# Altium PCB game-and-watch-STLINK-PCB.PcbDoc
Units mil, origin at the board's own origin, x right, y up, seen from the top; angles counter-clockwise.
Board outline 555 x 1515.81 mil, 2 copper layers (Top Layer, Bottom Layer), stack 61.756 mil thick; 31 components, 53 nets, 140 pads, 35 vias.
Unrouted connection lines stored in the file: 27.
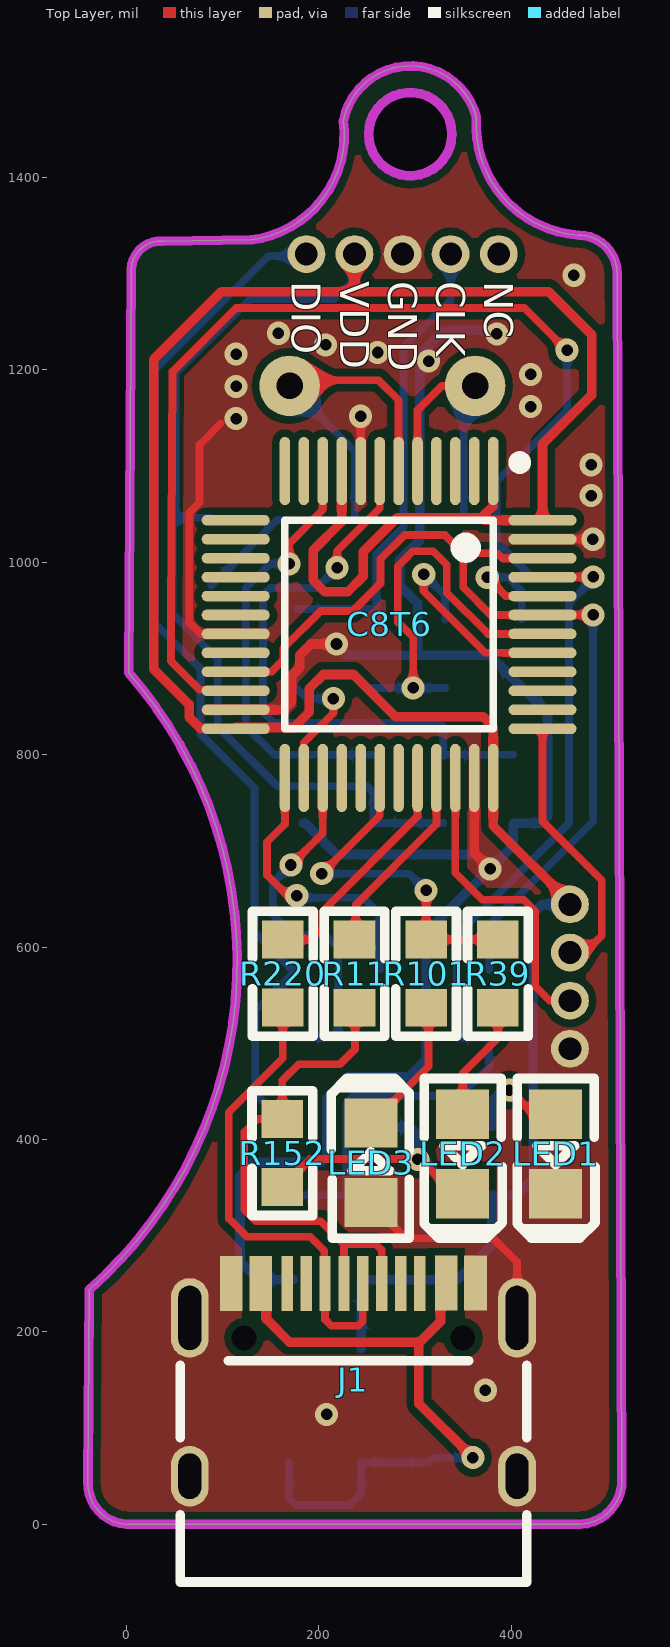
[diagram p0: Top Layer view]
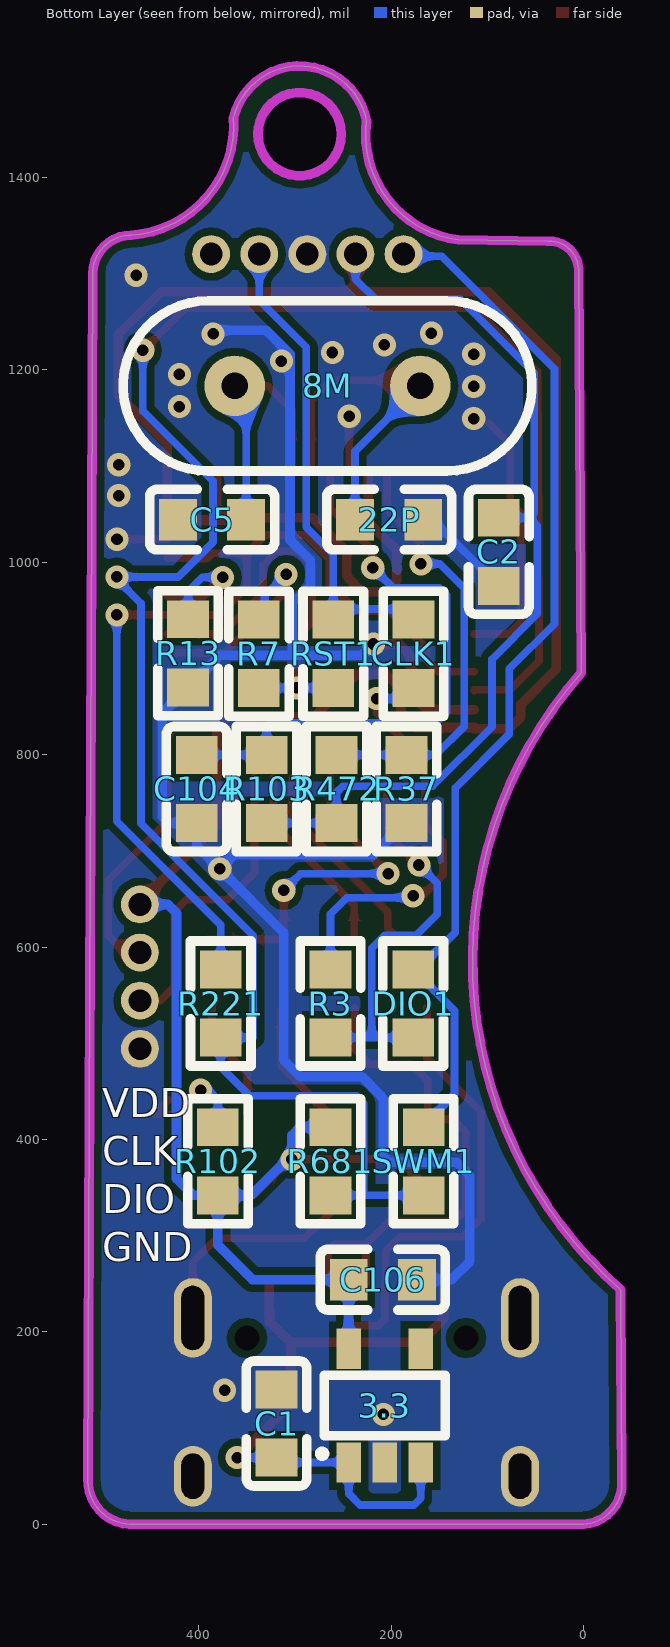
[diagram p1: Bottom Layer view, seen from below]

## Layer stack, top to bottom
Top Solder: solder mask 1, SM-001, Dk 4
Top Layer: signal copper 1.378
Dielectric 1: core 59, Core-043, Dk 4.3
Bottom Layer: signal copper 1.378
Bottom Solder: solder mask 1, SM-001, Dk 4

## Board outline
-40,45 -38.52,243.98 ccw(c-340,585) 2.36,884.96 5,1305 cw(c35.65,1303.17) 37.48,1333.82 130,1335 ccw(c115.81,1444.7) 225.51,1458.89 cw(c295,1445) 363.75,1462.19 ccw(c477.97,1454.22) 470,1340 cw(c470,1300) 510,1300 515,47.4 cw(c469.71,45.29) 471.81,0 0,0 cw(c2.5,42.5)
cut-out: 251.69,1445 ccw(c295,1445) 295,1401.69 ccw(c295,1445) 338.31,1445 ccw(c295,1445) 295,1488.31 ccw(c295,1445)

## Design rules (kind name [scope] priority, off if disabled: settings)
Clearance [All] p1: gap=8 ignorepadtopadclearanceinfootprint=TRUE except(0: Arc-Hole Track-Hole SMDPad-Hole THPad-Hole Via-Hole Fill-Hole Poly-Hole Region-Hole Text-Hole)
ComponentClearance [All] p1: gap=0 collisioncheckmode=3 verticalgap=0 showdistances=FALSE
MinimumSolderMaskSliver [All] p1: minsoldermaskwidth=0
PolygonConnect [All] p1: connectstyle=Direct reliefconductorwidth=10 reliefentries=4 polygonreliefangle="90 Angle" airgapwidth=10
RoutingVias [All] p1: holewidth=12 width=24 viastyle="Through Hole" minholewidth=12 minwidth=24 maxholewidth=12 maxwidth=24
SilkToSilkClearance [All] p1: silktosilkclearance=0
SilkToSolderMaskClearance [IsPad] p1: minsilkscreentomaskgap=0 clearancetoexposedcopper=TRUE
SolderMaskExpansion [All] p1: expansion=4 istentingtop=FALSE
Width [All] p1: maxlimit=10 minlimit=8 preferedwidth=8
26 further rules are at their usual default settings.

## Components (designator, comment, footprint, x,y, rotation, side; value= is the part's Value field where it differs from the comment)
3.3 "TPS76333DBVR" SOT-23-5 206.59,123.36 r270 bottom
8M "8MHZ" OSC-49S-1 265.99,1183.3 r90 bottom locked
22P "22p" C0603#1 201.99,1044.3 r180 bottom
C1 "10u" C0603#1 318.99,104.74 r90 bottom
C2 "10u" C0603#2 87.99,1010.84 r90 bottom
C5 "22p" C0603#1 385.99,1044.3 r0 bottom
C8T6 "STM32F103CBT6" LQFP-48_7X7X05P 272.99,935.3 r270 top
C104 "0.1u" C0603#2 401.99,764.3 r270 bottom
C106 "10u" C0603#1 208.56,254.3 r180 bottom
CLK1 "22" R0603#1 176.66,904.87 r270 bottom
DIO1 "22" R0603#1 176.99,541.3 r270 bottom
J1 "USB type C" "USB Type-C-16Pin_A" 235.91,50 r0 top locked
LED1 "17-21/BHC-XL2M2TY/3T" LED-0805 445.99,384.95 r90 top
LED2 "LED-Green(0805)" LED-SMD_0805-L 349.44,384.95 r270 top
LED3 "LED-Red(0805)" LED-SMD_0805-L 253.99,375.85 r90 top
R3 "100" R0603#2 262.99,541.3 r270 bottom
R7 "220" R0603#2 337.33,904.87 r270 bottom
R11 "22" R0603#2 237.04,572.3 r90 top
R13 "10K" R0603#2 410.99,905.3 r90 bottom
R37 "4.7k" R0603#1 183.99,764.3 r270 bottom
R39 "100" R0603#1 385.99,572.3 r270 top
R101 "100" R0603#1 311.51,572.3 r270 top
R102 "1K" R0603#2 379.99,377.3 r90 bottom
R103 "10K" R0603#2 329.33,764.3 r90 bottom
R152 "1.5k" R0603#2 161.99,385.87 r90 top
R220 "22" R0603#2 162.56,572.44 r90 top
R221 "220" R0603#2 376.99,541.3 r270 bottom
R472 "4.7k" R0603#1 256.66,764.3 r270 bottom
R681 "680" R0603#2 262.99,377.3 r90 bottom
RST1 "22" R0603#2 259.99,904.87 r90 bottom
SWM1 "22" R0603#2 166.15,377.3 r90 bottom

## Footprints (in the part's own frame and the unit in brackets; to place one, negate y for a bottom-side part, rotate by r counter-clockwise, add the part's x,y. Pads: shape width x height; smd on the part's side, far side on the other; paste and mask are expansions set on the pad)
C0603#1 [mm]
  rect 1x1.1 smd: 1(0.9,0) 2(-0.9,0)
  silkscreen extent -1.65,-0.8 1.65,0.8
C0603#2 [mm]
  rect 1x1.1 smd: 1(-0.9,0) 2(0.9,0)
  silkscreen extent -1.65,-0.8 1.65,0.8
LED-0805 [mil]
  rect 51.2x55.1 smd: 1(41.35,0) 2(-41.35,0)
  silkscreen extent -88,-41 78,40
LED-SMD_0805-L [mil]
  rect 51.2x55.1 smd: 1(41.35,0) 2(-41.35,0)
  silkscreen extent -78,-40 88,41
LQFP-48_7X7X05P [mm]
  oval 1.8x0.28 smd: 1(-4.05,2.75) 2(-4.05,2.25) 3(-4.05,1.75) 4(-4.05,1.25) 5(-4.05,0.75) 6(-4.05,0.25) 7(-4.05,-0.25) 8(-4.05,-0.75) 9(-4.05,-1.25) 10(-4.05,-1.75) 11(-4.05,-2.25) 12(-4.05,-2.75) 25(4.05,-2.75) 26(4.05,-2.25) 27(4.05,-1.75) 28(4.05,-1.25) 29(4.05,-0.75) 30(4.05,-0.25) 31(4.05,0.25) 32(4.05,0.75) 33(4.05,1.25) 34(4.05,1.75) 35(4.05,2.25) 36(4.05,2.75)
  oval 0.28x1.8 smd: 13(-2.75,-4.05) 14(-2.25,-4.05) 15(-1.75,-4.05) 16(-1.25,-4.05) 17(-0.75,-4.05) 18(-0.25,-4.05) 19(0.25,-4.05) 20(0.75,-4.05) 21(1.25,-4.05) 22(1.75,-4.05) 23(2.25,-4.05) 24(2.75,-4.05) 37(2.75,4.05) 38(2.25,4.05) 39(1.75,4.05) 40(1.25,4.05) 41(0.75,4.05) 42(0.25,4.05) 43(-0.25,4.05) 44(-0.75,4.05) 45(-1.25,4.05) 46(-1.75,4.05) 47(-2.25,4.05) 48(-2.75,4.05)
  silkscreen extent -4.42,-2.75 2.75,3.6
OSC-49S-1 [mm]
  round 1.6 hole 0.7: 1(0,-2.45) 2(0,2.45)
  silkscreen extent -2.25,-5.39 2.25,5.39
R0603#1 [mm]
  rect 1x1.1 smd: 1(0.9,0) 2(-0.9,0)
  silkscreen extent -1.65,-0.8 1.65,0.8
R0603#2 [mm]
  rect 1x1.1 smd: 1(-0.9,0) 2(0.9,0)
  silkscreen extent -1.65,-0.8 1.65,0.8
SOT-23-5 [mm]
  rect 1.06x0.65 smd: 1(1.5,-0.95) 2(1.5,0) 3(1.5,0.95) 4(-1.5,0.95) 5(-1.5,-0.95)
  silkscreen extent -0.8,-1.71 1.33,1.6
"USB Type-C-16Pin_A" [mm]
  round 0 hole 0.65: 0(-2.89,3.65) 0(2.89,3.65)
  oval 1x1.6 hole 0.6 slot 1.2 at 90 deg: 1(-4.32,0) 1(4.32,0)
  oval 1x2.1 hole 0.6 slot 1.7 at 90 deg: 1(-4.32,4.18) 1(4.32,4.18)
  rect 0.3x1.45 smd: A1(-3.375,5.092) A4(-2.6,5.092) A5(-1.25,5.092) A6(-0.25,5.092) A7(0.25,5.092) A8(-1.75,5.092) A9(2.6,5.1) A12(3.375,5.1) B1(3.075,5.1) B4(2.3,5.1) B5(1.75,5.092) B6(0.75,5.092) B7(-0.75,5.092) B8(1.25,5.092) B9(-2.3,5.092) B12(-3.075,5.092)
  silkscreen extent -4.57,-2.79 4.57,3.05, body extent -4.47,-2.6 4.47,5.3, height 3.25

## Part data
J1: library part USB_C

## Free pads (board coordinates)
  round 39.37 hole 23.62: ""(186.99,1320.3) ""(236.99,1320.3) ""(286.99,1320.3) ""(336.99,1320.3) ""(386.99,1320.3) ""(460.99,494.3) ""(460.99,544.3) ""(460.99,594.3) ""(460.99,644.3)

## Via types
v1: diameter 24, hole 12, Top Layer to Bottom Layer, tented both sides, 35 vias

## Nets (pads, with @x,y where several pads share a name; then routed paths per layer and width w, separated by ;. In a path a pad name is that pad's centre, name@x,y a point inside that pad or via, vN(x,y) a via of type N, cw(c..) or ccw(c..) an arc to the next point about the centre after c; other vN are vias at no path point)
5V: 3.3.1 3.3.3 C1.2 J1.A4 J1.A9 J1.B4 J1.B9 | length 691.7
  Top Layer w10: J1.B9 145.35,213.18 169.22,189.3 302.99,189.3 303.99,190.3 ; J1.B4 326.46,210.77 305.99,190.3 303.99,190.3 ; v1(359.99,69.3) 303.99,125.3 303.99,190.3
  Bottom Layer w8: 3.3.3 169.19,27.1 176.29,20 231.99,20 243.99,32 3.3.1 313.99,64.3 C1.2 v1(359.99,69.3)
5V_IN: 
+5V: 
BOOT1: C8T6.20
D2+: J1.A6 J1.B6 R11.1 R152.2 | length 533.8
  Top Layer w8: J1.A6 226.06,291.24 ; R11.1@237.56,537 237.56,493.87 221.99,478.3 178.96,478.3 161.99,461.34 R152.2 135.99,421.3 122.38,407.69 122.38,327.23 134.65,314.97 201.99,314.97 221.06,295.9 221.39,295.9 226.06,291.24 ; J1.B6 265.43,285.03 259.22,291.24 226.06,291.24
D2-: J1.A7 J1.B7 R220.1 | length 511.2
  Top Layer w8: R220.1 162.56,484.53 106.38,428.36 106.38,317.91 125.33,298.97 191.02,298.97 205.59,284.39 205.59,250.47 J1.B7 206.37,212.92 212.99,206.3 240.99,206.3 245.74,211.05 J1.A7
D+: 
D-: 
GND: 
GND5: 3.3.2 22P.1 C1.1 C2.1 C5.1 C8T6.8 C8T6.19 C8T6.23 C8T6.35 C8T6.47 C104.2 C106.1 J1.1 J1.A1 J1.A12 J1.B1 J1.B12 LED1.2 LED3.2 pad.@286.99,1320.3 pad.@460.99,494.3 R13.1 R37.1 | length 2729.7
  Top Layer w8: 97.99,1144.3 75.99,1122.3 75.99,1062.25 65.11,1051.37 65.11,937.59 64.99,937.47 77,925.46 C8T6.19 ; C8T6.8 v1(243.46,1151.77) ; LED3.2 253.99,333.3 289.99,297.3 357.99,297.3 380.99,297.3 405.99,272.31 J1.1@405.99,214.57 ; C8T6.47 v1(484.83,1023.88)
  Top Layer w10: C8T6.23 163.41,846.72 171.99,855.3 171.99,882.3 180.16,890.47 180.16,903.47 191.67,914.98 v1(218.31,914.98) ; C8T6.35 361.57,697.72 v1(377.99,681.3)
  Bottom Layer w8: C2.1 156.89,1044.3 22P.1
  Bottom Layer w10: C106.1 136.99,254.3 117.99,273.3 117.99,362.3 131.99,376.3 201.99,376.3 207.99,382.3 207.99,442.3 210.34,444.65 210.34,445.26 230.38,465.3 293.99,465.3 311.51,482.82 311.51,614.82 v1(377.99,681.3) ; R37.1 185.78,728.87 218.46,696.18 363.11,696.18 v1(377.99,681.3) ; v1(218.31,914.98) 229.99,903.3 303.78,903.3 ; v1(384.99,1237.3) 380.99,1241.3 329.99,1241.3 304.99,1216.3 304.99,1023.3 283.99,1002.3 283.99,976.02 302.67,957.34 302.67,904.4 303.78,903.3 ; 303.78,903.3 377.56,903.3 R13.1 437.65,843.21 437.65,735.62 430.89,728.87 C104.2 401.99,705.3 v1(377.99,681.3)
  other v1: 207.99,114.3 372.99,139.3 482.99,1069.3 482.99,1101.3 113.99,1149.3 419.99,1161.8 113.99,1182.8 419.99,1195.3 314,1209 113.99,1216.3 261,1218 207,1226 158,1238 464.99,1298.3
IN_5V: 
J-SWCLK: C8T6.37 pad.@460.99,594.3 | length 291.1
  Top Layer w8: C8T6.37 432.44,730.85 493.99,669.3 493.99,611.62 476.68,594.3 pad.@460.99,594.3 ; pad.@462.99,599.3 pad.@472.99,599.3
J-SWDIO: C8T6.34 pad.@460.99,544.3 | length 330.4
  Top Layer w8: C8T6.34 341.89,677.4 369.99,649.3 412.99,649.3 424.99,637.3 424.99,559.3 439.99,544.3 460.99,544.3 pad.@462.99,544.3 ; pad.@462.99,549.3 pad.@472.99,549.3
J_SWIM: DIO1.2 pad.@186.99,1320.3 SWM1.2 | length 1090.7
  Bottom Layer w8: SWM1.2@168.56,412.73 133.99,447.3 133.99,533.73 DIO1.2 171.56,576.73 133.18,615.11 133.18,765.25 76.99,821.43 76.99,889.13 29.99,936.13 29.99,1200.76 147.18,1317.95 184.64,1317.95 pad.@186.99,1320.3
J_SWIM_RST: CLK1.2 pad.@336.99,1320.3 RST1.2 | length 489.2
  Bottom Layer w8: CLK1.2@177.66,951.3 RST1.2@254.99,951.3 ; RST1.2 259.99,1008.56 287.99,1036.56 287.99,1223.34 336.99,1272.34 pad.@336.99,1320.3
LED2_2: LED2.2 R39.1 | length 125.7
  Top Layer w8: LED2.2 349.44,468.75 385.99,505.3 R39.1
LED3_1: LED3.1 R101.1 | length 145.1
  Top Layer w8: LED3.1@253.04,415 313.99,475.95 R101.1@313.99,534.87
LED_STLINK: C8T6.30 R39.2 R101.2 | length 367.1
  Top Layer w8: v1(202.99,676.3) 263.15,736.46 C8T6.30 ; R101.2 v1(311.51,658.82) ; R101.2@314.18,607.87 R39.2@389.99,607.87
  Bottom Layer w8: v1(202.99,676.3) 294.04,676.3 v1(311.51,658.82)
NRST: C8T6.7 C104.1 R103.2 | length 631.8
  Top Layer w8: v1(218.99,994.3) 218.99,1011.85 263.15,1056.01 C8T6.7
  Bottom Layer w8: v1(218.99,994.3) 197.99,973.3 149.94,973.3 142.01,965.37 142.01,844.37 153.07,833.3 325.29,833.3 329.33,829.26 R103.2 C104.1 ; R103.2@324.17,803.42 R103.2@329.33,798.26
PA0: C8T6.10 R37.2 R472.2 | length 455
  Top Layer w8: v1(168.99,998.3) 168.99,1019.3 204.09,1054.4 C8T6.10
  Bottom Layer w8: v1(168.99,998.3) 149.48,998.3 124.01,972.83 124.01,829.29 153.56,799.74 R37.2 R472.2
PA1: C8T6.11
PA4: C8T6.14
PA5: C8T6.15
PA6: C8T6.16
PA7: C8T6.17
PA8: C8T6.29
PA10: C8T6.31
PA15: C8T6.38
PB0: C8T6.18
PB3: C8T6.39
PB4: C8T6.40
PB12: C8T6.25 R3.1 | length 300.1
  Top Layer w8: C8T6.25 164.72,727.71 145.99,708.98 145.99,674.95 167.64,653.3 v1(176.99,653.3)
  Bottom Layer w8: v1(176.99,653.3) 178.99,651.3 245.99,651.3 262.99,634.3 R3.1
PB15: C8T6.28
PC14: C8T6.3
PC15: C8T6.4
R1_2: LED1.1 R102.2 | length 130.3
  Top Layer w8: v1(397.99,451.3) 422.99,426.3 LED1.1 LED1.1@430.99,441.3
  Bottom Layer w8: R102.2 379.99,441.3 389.99,451.3 v1(397.99,451.3)
R13_2: C8T6.44 R13.2 | length 136.4
  Top Layer w8: v1(374.99,984.3) 394.46,964.83 C8T6.44
  Bottom Layer w8: v1(374.99,984.3) 396.25,984.3 410.99,969.55 R13.2
RX2: C8T6.13
SWCLK: C8T6.26 CLK1.1 | length 138.1
  Top Layer w8: C8T6.26 184.41,812.27 214.99,842.85 v1(214.99,858.3)
  Bottom Layer w8: CLK1.1 187.79,858.3 v1(214.99,858.3)
SWDIO: C8T6.27 DIO1.1 R3.2 | length 424.8
  Top Layer w8: v1(170.99,685.3) 204.09,718.4 C8T6.27
  Bottom Layer w8: v1(170.99,685.3) 151.99,666.3 151.99,634.3 173.99,612.3 206.5,612.3 219.99,598.8 219.99,505.87 ; DIO1.1 219.99,505.87 ; R3.2 219.99,505.87
SWIM: C8T6.22 C8T6.45 R221.2 R681.1 SWM1.1 | length 2189.6
  Top Layer w8: C8T6.22 113.54,867.58 75.95,867.58 46.25,897.28 46.25,942.46 47.85,1198.16 113.99,1264.3 413.45,1264.3 457.45,1220.3 v1(457.99,1220.3) ; C8T6.45@432.6,984.67 v1(484.99,984.67)
  Bottom Layer w8: SWM1.1 231.5,341.87 ; R681.1 231.5,341.87 ; v1@457.99,1219.76 457.99,1157.26 384.99,1084.26 384.99,1021.01 421.33,984.67 v1(484.99,984.67) ; v1@483.7,981.01 459.99,957.3 459.99,728.56 343.34,611.9 343.34,505.86 R221.2 376.99,475.3 347.11,445.42 235.95,445.42 228.34,437.8 228.34,345.02 231.5,341.87
SWIM_IN: C8T6.21 C8T6.43 C8T6.46 R221.1 | length 1005.3
  Top Layer w8: C8T6.21 150.78,886.09 163.16,898.47 163.16,910.51 201.95,949.3 235.45,949.3 263.99,977.85 263.99,1003.11 289.18,1028.3 330.99,1028.3 349.99,1009.3 ; C8T6.46 390.45,1004.2 385.35,1009.3 349.99,1009.3 ; v1(484.99,945.3) 432.6,945.3 C8T6.43 378.8,945.14 349.99,973.95 349.99,1009.3
  Bottom Layer w8: R221.1 376.99,622.93 484.99,730.93 v1(484.99,945.3)
SWIM_RST: C8T6.42 R7.2 RST1.1 | length 417.5
  Top Layer w8: 286.99,1000.66 281.99,995.66 281.99,937.88 297.99,921.88 v1(297.99,869.3) ; 288.64,1002.3 297.64,1011.3 318.93,1011.3 332.99,997.24 332.99,968.32 375.85,925.46 C8T6.42
  Bottom Layer w8: RST1.1@253.99,869.43 254.13,869.3 v1(297.99,869.3) 331.19,869.3 R7.2@331.33,869.44
SWIM_RST_IN: C8T6.41 R7.1 | length 223.8
  Top Layer w8: v1(308.99,987.3) 308.99,969.69 372.91,905.77 C8T6.41
  Bottom Layer w8: v1(308.99,987.3) 331.33,964.97 R7.1@331.33,940.3
TX2: C8T6.12
U6_2: C8T6.2
U7_4: 3.3.4
USB-D+: C8T6.33 R11.2 | length 202.7
  Top Layer w8: R11.2@238.37,607.87 238.37,643.68 322.2,727.51 C8T6.33
USB-D-: C8T6.32 R220.2 | length 242.9
  Top Layer w8: R220.2 191.56,607.87 203.38,619.69 203.38,636.69 302.52,735.83 C8T6.32
VCC: 
VCC5: 3.3.5 C2.2 C8T6.1 C8T6.9 C8T6.24 C8T6.36 C8T6.48 C106.2 LED2.1 pad.@236.99,1320.3 pad.@460.99,644.3 R102.1 R103.1 R152.1 R472.1 R681.2 | length 4216.2
  Top Layer w8: R152.1@152.44,340.88 R152.1 191.16,379.6 304.69,379.6 340.69,343.6 LED2.1
  Top Layer w10: C8T6.9 223.78,1042.09 193.99,1012.3 193.99,981.3 205.99,969.3 229.99,969.3 245.99,985.3 245.99,1010.57 281.73,1046.3 369.22,1046.3 ; pad.@236.99,1320.3 236.99,1281.3 ; C8T6.1 381.26,1058.34 369.22,1046.3 ; pad.@462.99,644.3 381.26,726.03 C8T6.36 381.26,829.03 370.99,839.3 279.91,839.3 235.91,883.3 204.64,883.3 189.99,868.66 189.99,844.3 173.9,828.21 113.54,828.21 C8T6.24 77.13,827.03 65.11,839.05 65.11,852.18 28.25,889.05 28.25,1210.56 98.99,1281.3 236.99,1281.3 ; 236.99,1281.3 438.76,1281.3 483.54,1236.52 483.54,1173.84 432.44,1122.75 C8T6.48 371.95,1043.57 369.22,1046.3
  Bottom Layer w8: C2.2 56.49,1046.27 ; pad.@236.99,1320.3 236.99,1294.3 215.99,1273.3 127.99,1273.3 50.99,1196.3 50.99,1051.77 56.49,1046.27 ; R103.1 R472.1 256.66,760.63 250.24,767.05 156.95,767.05 94.99,829.01 94.99,899.3 47.99,946.3 47.99,1037.77 56.49,1046.27
  Bottom Layer w10: 3.3.5 C106.2 343.99,254.3 379.99,290.3 R102.1 ; R681.2 294.49,412.73 302.99,404.23 v1(302.99,379.3) 307.99,379.3 345.43,341.87 R102.1 ; pad.@460.99,644.3 431.99,644.3 422.99,635.3 422.99,359.35 405.51,341.87 R102.1
X2_1: 8M.1 22P.2 C8T6.6 | length 346.3
  Top Layer w8: 8M.1@188.53,1183.3 194.53,1189.3 261.99,1189.3 282.83,1168.46 C8T6.6
  Bottom Layer w8: 8M.1 237.43,1115.41 237.43,1081.87 22P.2
X2_2: 8M.2 C5.2 C8T6.5 | length 296.5
  Top Layer w8: C8T6.5 302.52,1157.83 327.99,1183.3 8M.2 8M.2@381.45,1183.3
  Bottom Layer w8: C5.2 350.56,1171.41 8M.2
pads on no net: J1.0 J1.A5 J1.A8 J1.B5 J1.B8

## Polygon pours and split planes (outlines as drawn)
GND5 on Bottom Layer "GND5_L02_P001" (solid, remove dead copper, pour order 1): -40,45 -38.52,243.98 ccw(c-340,585) 2.36,884.96 5,1305 cw(c35.65,1303.17) 37.48,1333.82 130,1335 ccw(c115.81,1444.7) 225.51,1458.89 cw(c295,1445) 363.75,1462.19 ccw(c477.97,1454.22) 470,1340 cw(c470,1300) 510,1300 515,47.4 cw(c469.71,45.29) 471.81,0 0,0 cw(c2.5,42.5)
GND5 on Top Layer "GND5_L01_P000" (solid, remove dead copper, pour order 0): -40,45 -38.52,243.98 ccw(c-340,585) 2.36,884.96 5,1305 cw(c35.65,1303.17) 37.48,1333.82 130,1335 ccw(c115.81,1444.7) 225.51,1458.89 cw(c295,1445) 363.75,1462.19 ccw(c477.97,1454.22) 470,1340 cw(c470,1300) 510,1300 515,47.4 cw(c469.71,45.29) 471.81,0 0,0 cw(c2.5,42.5)

## Keep-outs
Keep-Out Layer:
  circle w10: c295,1445 r43.31
  lines w10: -40,45 ccw(c2.5,42.5) 0,0 471.81,0 ccw(c469.71,45.29) 515,47.4 510,1300 ccw(c470,1300) 470,1340 cw(c477.97,1454.22) 363.75,1462.19 ccw(c295,1445) 225.51,1458.89 cw(c115.81,1444.7) 130,1335 37.48,1333.82 ccw(c35.65,1303.17) 5,1305 2.36,884.96 cw(c-340,585) -38.52,243.98 -40,45

## Silkscreen, mask and mechanical layers (free items; w line width, h text height)
Top Overlay:
  text "DIO" at 171.99,1292.3 h30 r270
  text "VDD" at 221.99,1292.3 h30 r270
  text "GND" at 271.99,1292.3 h30 r270
  text "CLK" at 321.99,1292.3 h30 r270
  text "NC" at 371.99,1292.3 h30 r270
Bottom Overlay:
  text "VDD" at 499.99,423.3 h30
  text "CLK" at 499.99,373.3 h30
  text "DIO" at 499.99,323.3 h30
  text "GND" at 499.99,273.3 h30